# EAGLE board Energiezelle (EAGLE 6.4)
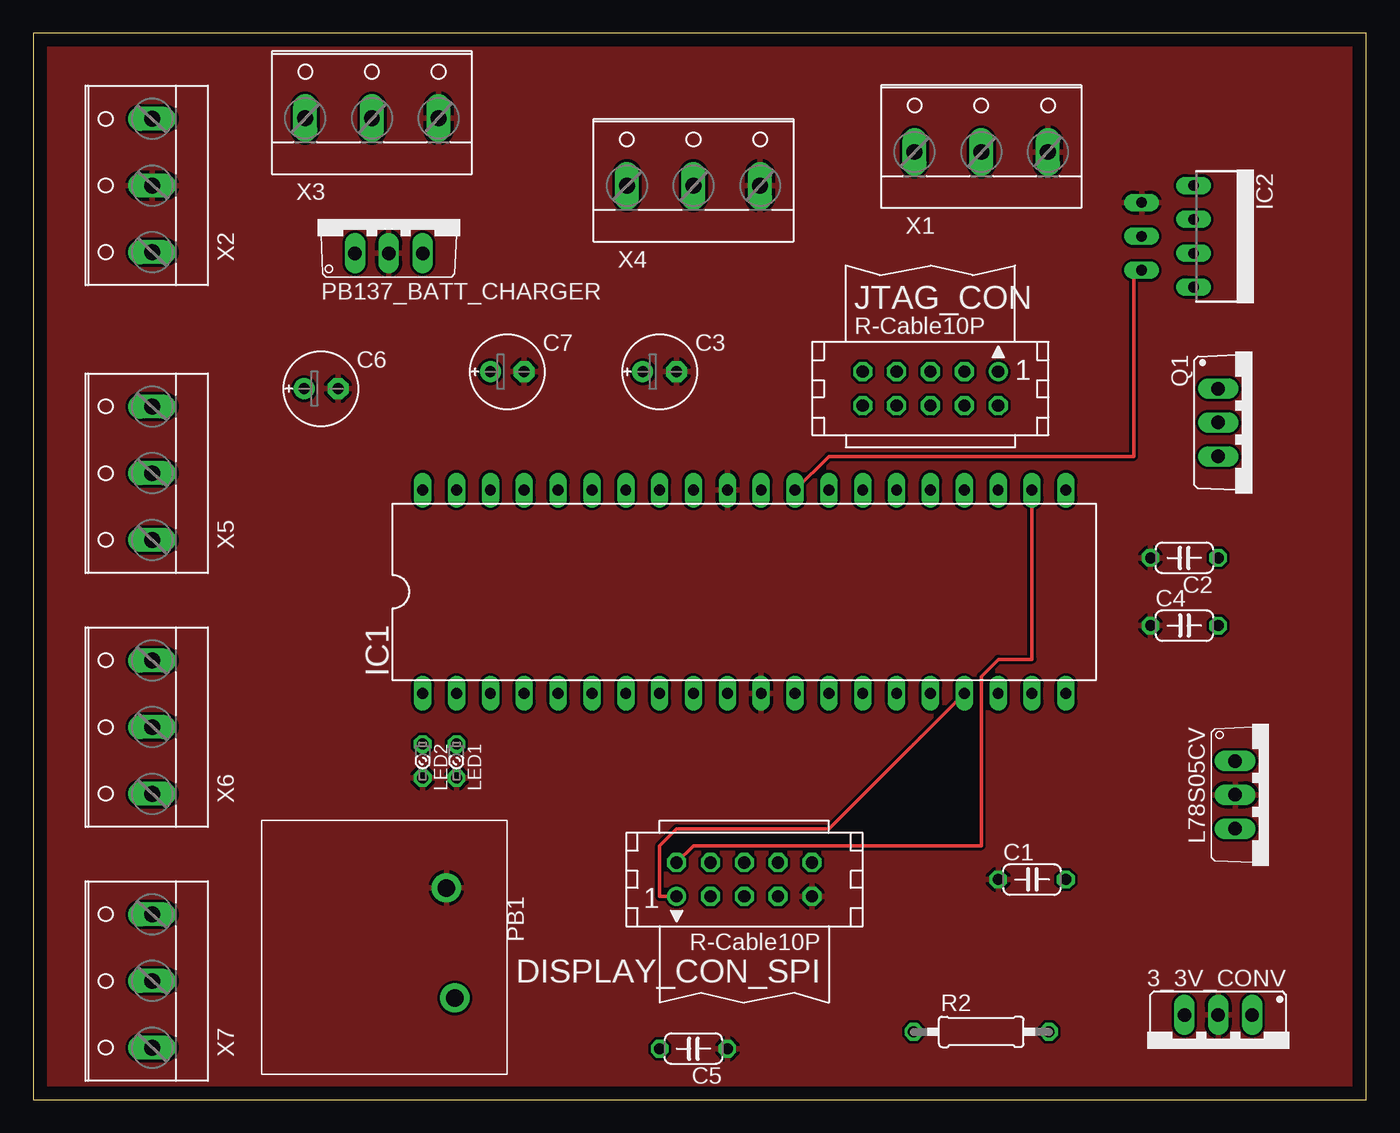
[diagram p0: board, top side]
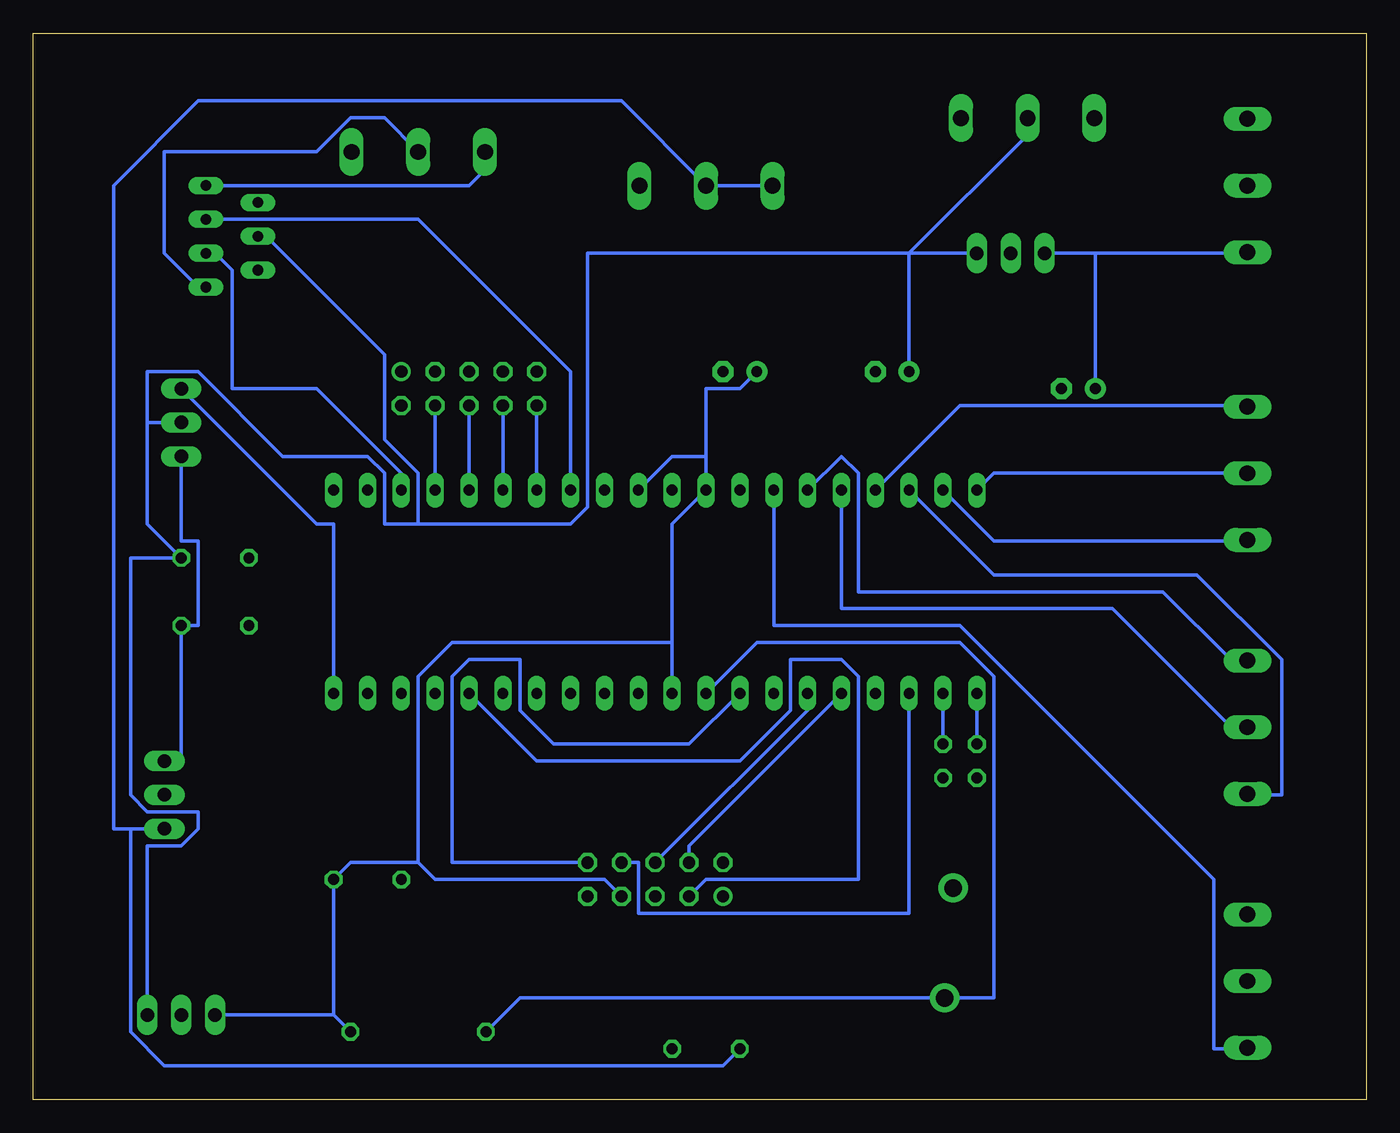
[diagram p1: board, bottom side, seen from below]

Size 100 x 80 mm. Coordinates in mm from the lower left corner, seen from the top.
Outline: 0,0 100,0 100,80 0,80 0,0
Copper layers (1*16): Top 0.035mm / dielectric 1.5mm / Bottom 0.035mm
Design rules "default": minimum track width 10mil, minimum drill 24mil, track to track 8mil, track to pad 8mil, pad to pad 8mil, via to via 8mil, smd to smd 8mil, copper to edge 40mil, drill to drill 8mil, minimum pad ring 10mil, minimum via ring 8mil, stop-mask expansion 4mil, vias tented up to drill 0mil, thermal gap 10mil

## Footprints (pad centres in the part's own frame; a part is rotated, then mirrored left to right if it is on the bottom)
TO220S = drill 1.016 long: 1 -2.54,-2.54; 2 0,-2.54; 3 2.54,-2.54
C050-024X044 = drill 0.813 octagon: 1 -2.54,0; 2 2.54,0
E2,5-6E = drill 0.813 pad 1.575: + -1.27,0 | drill 0.813 pad 1.575 octagon: - 1.27,0
CON10L = drill 0.914: 1 5.08,1.27 | drill 0.914 octagon: 2 5.08,-1.27; 3 2.54,1.27; 4 2.54,-1.27; 5 0,1.27; 6 0,-1.27; 7 -2.54,1.27; 8 -2.54,-1.27; 9 -5.08,1.27; 10 -5.08,-1.27
DIL40 = drill 0.813 long: 1 -24.13,-7.62; 2 -21.59,-7.62; 3 -19.05,-7.62; 4 -16.51,-7.62; 5 -13.97,-7.62; 6 -11.43,-7.62; 7 -8.89,-7.62; 8 -6.35,-7.62; 9 -3.81,-7.62; 10 -1.27,-7.62; 11 1.27,-7.62; 12 3.81,-7.62; 13 6.35,-7.62; 14 8.89,-7.62; 15 11.43,-7.62; 16 13.97,-7.62; 17 16.51,-7.62; 18 19.05,-7.62; 19 21.59,-7.62; 20 24.13,-7.62; 21 24.13,7.62; 22 21.59,7.62; 23 19.05,7.62; 24 16.51,7.62; 25 13.97,7.62; 26 11.43,7.62; 27 8.89,7.62; 28 6.35,7.62; 29 3.81,7.62; 30 1.27,7.62; 31 -1.27,7.62; 32 -3.81,7.62; 33 -6.35,7.62; 34 -8.89,7.62; 35 -11.43,7.62; 36 -13.97,7.62; 37 -16.51,7.62; 38 -19.05,7.62; 39 -21.59,7.62; 40 -24.13,7.62
P-TO220-7-11 = drill 0.8 pad 1.2 long: 1 -3.81,-1.85; 2 -2.54,-5.75; 3 -1.27,-1.85; 4 0,-5.75; 5 1.27,-1.85; 6 2.54,-5.75; 7 3.81,-1.85
TO220V = drill 1.016 long: 1 -2.54,-2.54; 2 0,-2.54; 3 2.54,-2.54
LSU260 = drill 0.813 octagon: A -1.27,0; K 1.27,0
PBNO-M = drill 1.3 pad 2.184: P$1 1.905,11.938; P$2 10.16,12.573
TO220BV = drill 1.016 long: D 0,-2.54; G -2.54,-2.54; S 2.54,-2.54
0207/10 = drill 0.813 octagon: 1 -5.08,0; 2 5.08,0
W237-103 = drill 1.194 long: 1 -5,-1.29; 2 0,-1.29; 3 5,-1.29

## Placement (x,y rotation side)
3_3V_CONV  3.3VRegulator  [TO220S]  88.9,3.81 180 top
C1  100n  [C050-024X044]  74.93,16.51 0 top
C2  100n  [C050-024X044]  86.36,40.64 180 top
C3  10u  [E2,5-6E]  46.99,54.61 0 top
C4  330n  [C050-024X044]  86.36,35.56 0 top
C5  100n  [C050-024X044]  49.53,3.81 180 top
C6  1u  [E2,5-6E]  21.59,53.34 0 top
C7  10u  [E2,5-6E]  35.56,54.61 0 top
DISPLAY_CON_SPI  [CON10L]  53.34,16.51 180 top
IC1  MEGA32-P  [DIL40]  53.34,38.1 0 top
IC2  BTS621  [P-TO220-7-11]  88.9,64.77 270 top
JTAG_CON  [CON10L]  67.31,53.34 0 top
L78S05CV  788TV  [TO220V]  92.71,22.86 270 top
LED1  green  [LSU260]  31.75,25.4 270 top
LED2  red  [LSU260]  29.21,25.4 270 top
PB1  PBNO-M  [PBNO-M]  19.05,17.78 270 top
PB137_BATT_CHARGER  788TV  [TO220V]  26.67,66.04 0 top
Q1  IRLU8721  [TO220BV]  91.44,50.8 270 top
R2  10k  [0207/10]  71.12,5.08 0 top
X1  [W237-103]  71.12,72.39 0 top
X2  [W237-103]  7.62,68.58 90 top
X3  [W237-103]  25.4,74.93 0 top
X4  [W237-103]  49.53,69.85 0 top
X5  [W237-103]  7.62,46.99 90 top
X6  [W237-103]  7.62,27.94 90 top
X7  [W237-103]  7.62,8.89 90 top

## Library data of the parts
3_3V_CONV = lf33
C1 C2 C4 C5 R2 = resistor
C3 C6 C7 = rcl
DISPLAY_CON_SPI JTAG_CON = con-harting; OC_FARNELL: unknown; OC_NEWARK: unknown
IC1 = avr-7
IC2 = infineon; OC_FARNELL: unknown; OC_NEWARK: unknown
L78S05CV PB137_BATT_CHARGER = linear
LED1 LED2 = led
PB1 = pushbuttons2
Q1 = transistor-power
X1-X7 = con-wago-500; MPN: 237-103; OC_FARNELL: unknown; OC_NEWARK: 18M7116

## Nets
+3V3: 3_3V_CONV.3 C1.2 C3.+ DISPLAY_CON_SPI.7 IC1.10 IC1.30 IC1.32 R2.2
+5V: C5.2 L78S05CV.3 X4.1 X4.2
+12V: 3_3V_CONV.1 C2.1 C7.+ IC2.4 PB137_BATT_CHARGER.3 Q1.D X3.2
BUTTON_LEFT: DISPLAY_CON_SPI.1 IC1.17
BUTTON_RIGHT: DISPLAY_CON_SPI.3 IC1.16
GND: 3_3V_CONV.2 C1.1 C2.2 C3.- C4.1 C5.1 C6.- C7.- DISPLAY_CON_SPI.9 IC1.11 IC1.31 IC2.2 L78S05CV.2 LED1.K LED2.K PB1.P$1 PB137_BATT_CHARGER.2 X1.3 X2.2 X3.3 X4.3
N$1: IC1.28 IC2.3
N$2: IC1.29 IC2.6
N$3: IC1.23 IC2.5
N$4: IC1.9 PB1.P$2 R2.1
N$5: DISPLAY_CON_SPI.10 IC1.8
N$6: DISPLAY_CON_SPI.8 IC1.3
N$7: DISPLAY_CON_SPI.6 IC1.6
N$8: DISPLAY_CON_SPI.4 IC1.5
N$9: IC2.1 X1.1
N$10: IC2.7 X1.2
N$11: C6.+ PB137_BATT_CHARGER.1 X2.1
N$12: IC1.27 JTAG_CON.10
N$13: IC1.26 JTAG_CON.8
N$14: IC1.25 JTAG_CON.6
N$15: IC1.24 JTAG_CON.4
N$16: IC1.39 X5.1
N$17: IC1.40 X5.2
N$18: IC1.37 X5.3
N$20: IC1.38 X6.1
N$21: IC1.36 X6.2
N$22: IC1.35 X6.3
N$23: IC1.34 X7.1
N$24: IC1.1 LED2.A
N$25: IC1.2 LED1.A
N$26: C4.2 L78S05CV.1 Q1.S
N$28: IC1.20 Q1.G
RESET: DISPLAY_CON_SPI.2 IC1.22

## Tracks (layer width: path | path; a pad name or v marks a point on that pad's centre or on a via)
+3V3
  Bottom 0.254: 49.53,48.26 49.53,53.34 46.99,53.34 C3.+ | 49.53,48.26 IC1.32 52.07,43.18 52.07,34.29 | 52.07,34.29 IC1.10 | IC1.30 52.07,48.26 49.53,48.26 | 77.47,6.35 R2.2 | 3_3V_CONV.3 77.47,6.35 | 77.47,6.35 C1.2 76.2,17.78 71.12,17.78 | DISPLAY_CON_SPI.7 57.15,16.51 69.85,16.51 71.12,17.78 | 52.07,34.29 68.58,34.29 71.12,31.75 71.12,17.78
+5V
  Bottom 0.254: 49.53,68.58 44.45,68.58 X4.1 | 49.53,68.58 X4.2 49.53,68.58 | C5.2 48.26,2.54 90.17,2.54 92.71,5.08 92.71,20.32 | L78S05CV.3 92.71,20.32 | 49.53,68.58 55.88,74.93 87.63,74.93 93.98,68.58 93.98,20.32 92.71,20.32
+12V
  Bottom 0.254: 91.44,50.8 91.44,43.18 C2.1 92.71,40.64 92.71,22.86 91.44,21.59 87.63,21.59 87.63,20.32 88.9,19.05 91.44,19.05 3_3V_CONV.1 | Q1.D 91.44,50.8 | 71.12,43.18 71.12,46.99 73.66,49.53 73.66,55.88 82.55,64.77 IC2.4 | 71.12,43.18 59.69,43.18 58.42,44.45 58.42,63.5 34.29,63.5 | PB137_BATT_CHARGER.3 34.29,63.5 | 34.29,63.5 C7.+ | 34.29,63.5 25.4,72.39 X3.2 | 91.44,50.8 91.44,54.61 87.63,54.61 81.28,48.26 74.93,48.26 73.66,46.99 73.66,43.18 71.12,43.18
BUTTON_LEFT
  Top 0.254: IC1.17 59.69,20.32 48.26,20.32 46.99,19.05 46.99,15.24 DISPLAY_CON_SPI.1
BUTTON_RIGHT
  Bottom 0.254: IC1.16 62.23,25.4 46.99,25.4 43.18,29.21 43.18,33.02 39.37,33.02 38.1,31.75 38.1,16.51 49.53,16.51 DISPLAY_CON_SPI.3
GND
  pour Top: 0,80.01 100.33,80.01 100.33,0 0,0
N$1
  Bottom 0.254: IC1.28 59.69,54.61 71.12,66.04 86.36,66.04 IC2.3
N$2
  Top 0.254: IC1.29 59.69,48.26 82.55,48.26 82.55,62.23 IC2.6
N$3
  Bottom 0.254: IC1.23 72.39,46.99 78.74,53.34 85.09,53.34 85.09,62.23 86.36,63.5 IC2.5
N$4
  Bottom 0.254: IC1.9 45.72,34.29 30.48,34.29 27.94,31.75 27.94,7.62 PB1.P$2 | 31.75,7.62 PB1.P$2 | 31.75,7.62 PB1.P$2 | R2.1 63.5,7.62 31.75,7.62 | 31.75,7.62 PB1.P$2
N$5
  Bottom 0.254: IC1.8 50.8,26.67 60.96,26.67 63.5,29.21 63.5,33.02 67.31,33.02 68.58,31.75 68.58,17.78 DISPLAY_CON_SPI.10
N$6
  Bottom 0.254: IC1.3 34.29,13.97 54.61,13.97 54.61,17.78 DISPLAY_CON_SPI.8
N$7
  Bottom 0.254: IC1.6 41.91,29.21 DISPLAY_CON_SPI.6
N$8
  Bottom 0.254: IC1.5 50.8,19.05 DISPLAY_CON_SPI.4
N$9
  Bottom 0.254: IC2.1 86.36,68.58 67.31,68.58 66.04,69.85 X1.1
N$10
  Bottom 0.254: IC2.7 87.63,60.96 90.17,63.5 90.17,71.12 78.74,71.12 76.2,73.66 73.66,73.66 71.12,71.12 X1.2
N$11
  Bottom 0.254: 20.32,63.5 10.16,63.5 X2.1 | 20.32,63.5 PB137_BATT_CHARGER.1 | 20.32,63.5 C6.+
N$12
  Bottom 0.254: JTAG_CON.10 IC1.27
N$13
  Bottom 0.254: JTAG_CON.8 IC1.26
N$14
  Bottom 0.254: JTAG_CON.6 IC1.25
N$15
  Bottom 0.254: JTAG_CON.4 IC1.24
N$16
  Bottom 0.254: IC1.39 27.94,41.91 10.16,41.91 X5.1
N$17
  Bottom 0.254: IC1.40 27.94,46.99 10.16,46.99 X5.2
N$18
  Bottom 0.254: IC1.37 30.48,52.07 10.16,52.07 X5.3
N$20
  Bottom 0.254: IC1.38 27.94,39.37 12.7,39.37 6.35,33.02 6.35,22.86 8.89,22.86 X6.1
N$21
  Bottom 0.254: IC1.36 39.37,36.83 19.05,36.83 10.16,27.94 X6.2
N$22
  Bottom 0.254: IC1.35 39.37,48.26 38.1,46.99 38.1,38.1 15.24,38.1 10.16,33.02 X6.3
N$23
  Bottom 0.254: IC1.34 44.45,35.56 30.48,35.56 11.43,16.51 11.43,3.81 10.16,3.81 X7.1
N$24
  Bottom 0.254: IC1.1 LED2.A
N$25
  Bottom 0.254: IC1.2 LED1.A
N$26
  Bottom 0.254: L78S05CV.1 88.9,25.4 C4.2 87.63,35.56 87.63,41.91 88.9,41.91 Q1.S
N$28
  Bottom 0.254: IC1.20 77.47,43.18 78.74,43.18 Q1.G
RESET
  Top 0.254: IC1.22 74.93,33.02 72.39,33.02 71.12,31.75 71.12,19.05 49.53,19.05 DISPLAY_CON_SPI.2